# EAGLE board pinconnections (EAGLE 8.2.2)
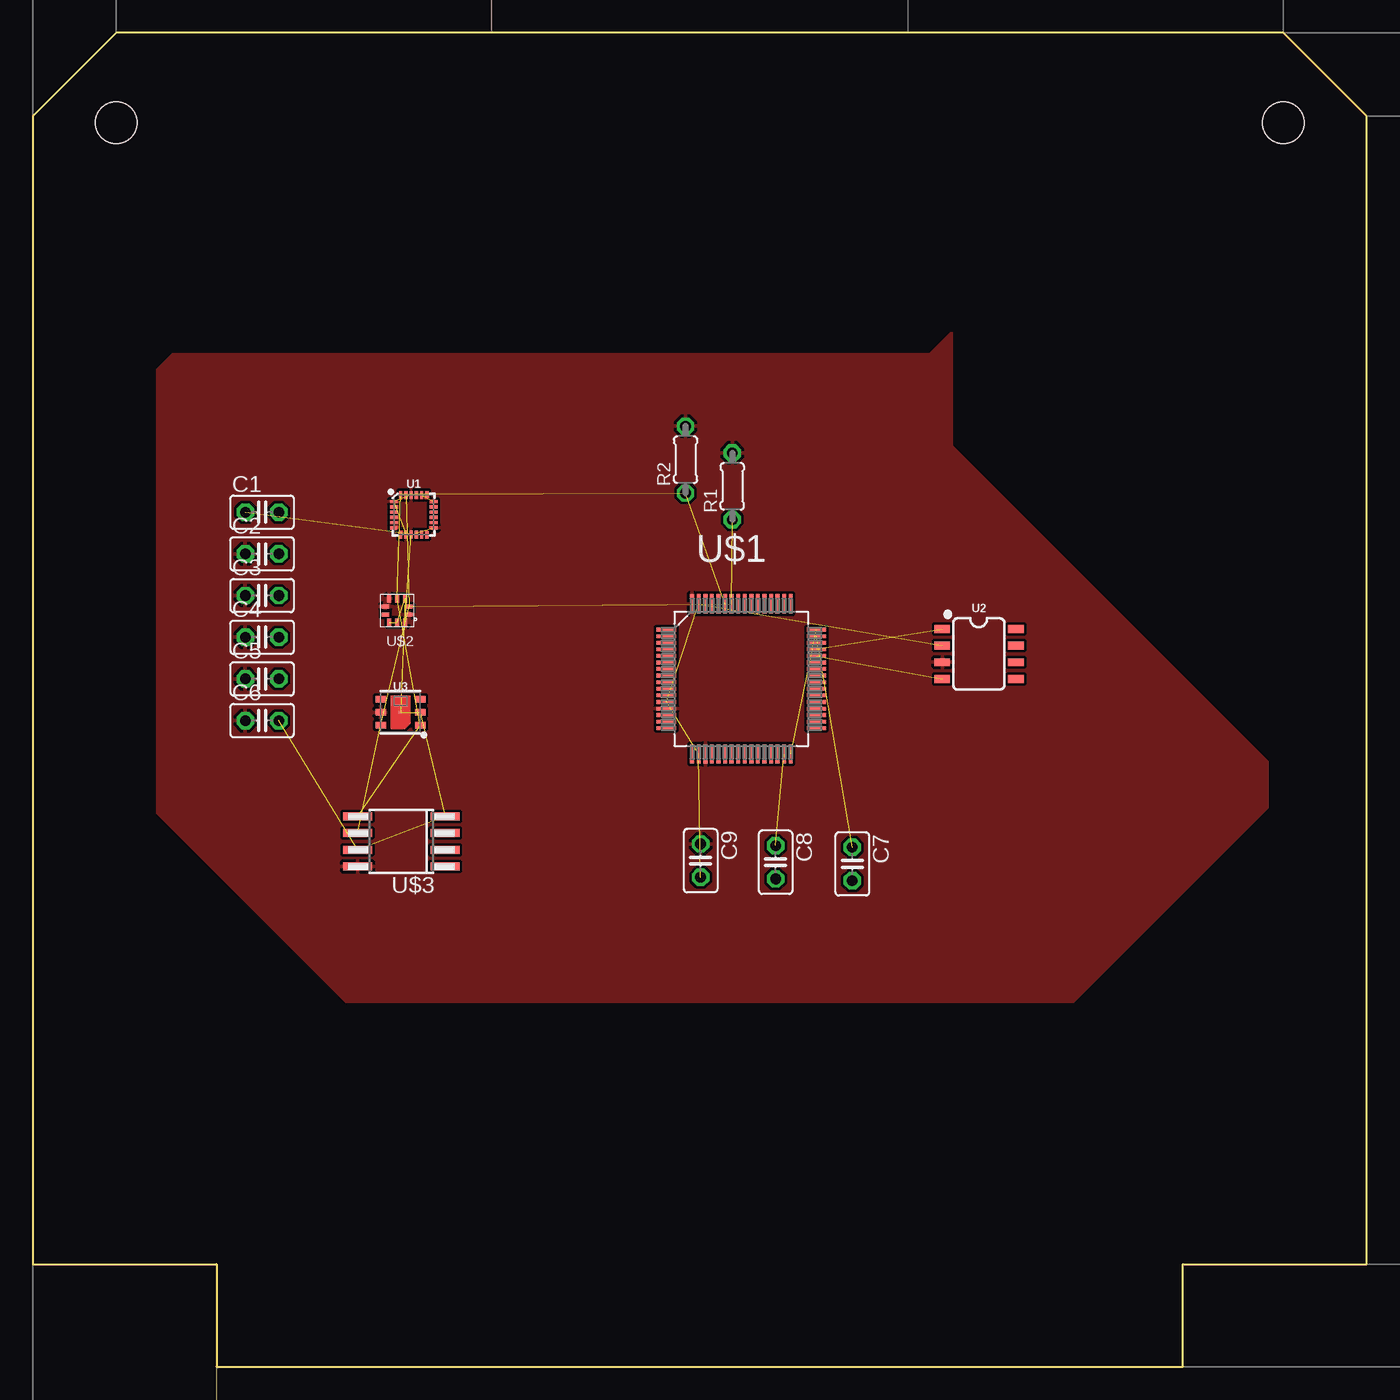
[diagram p0: board, top side]
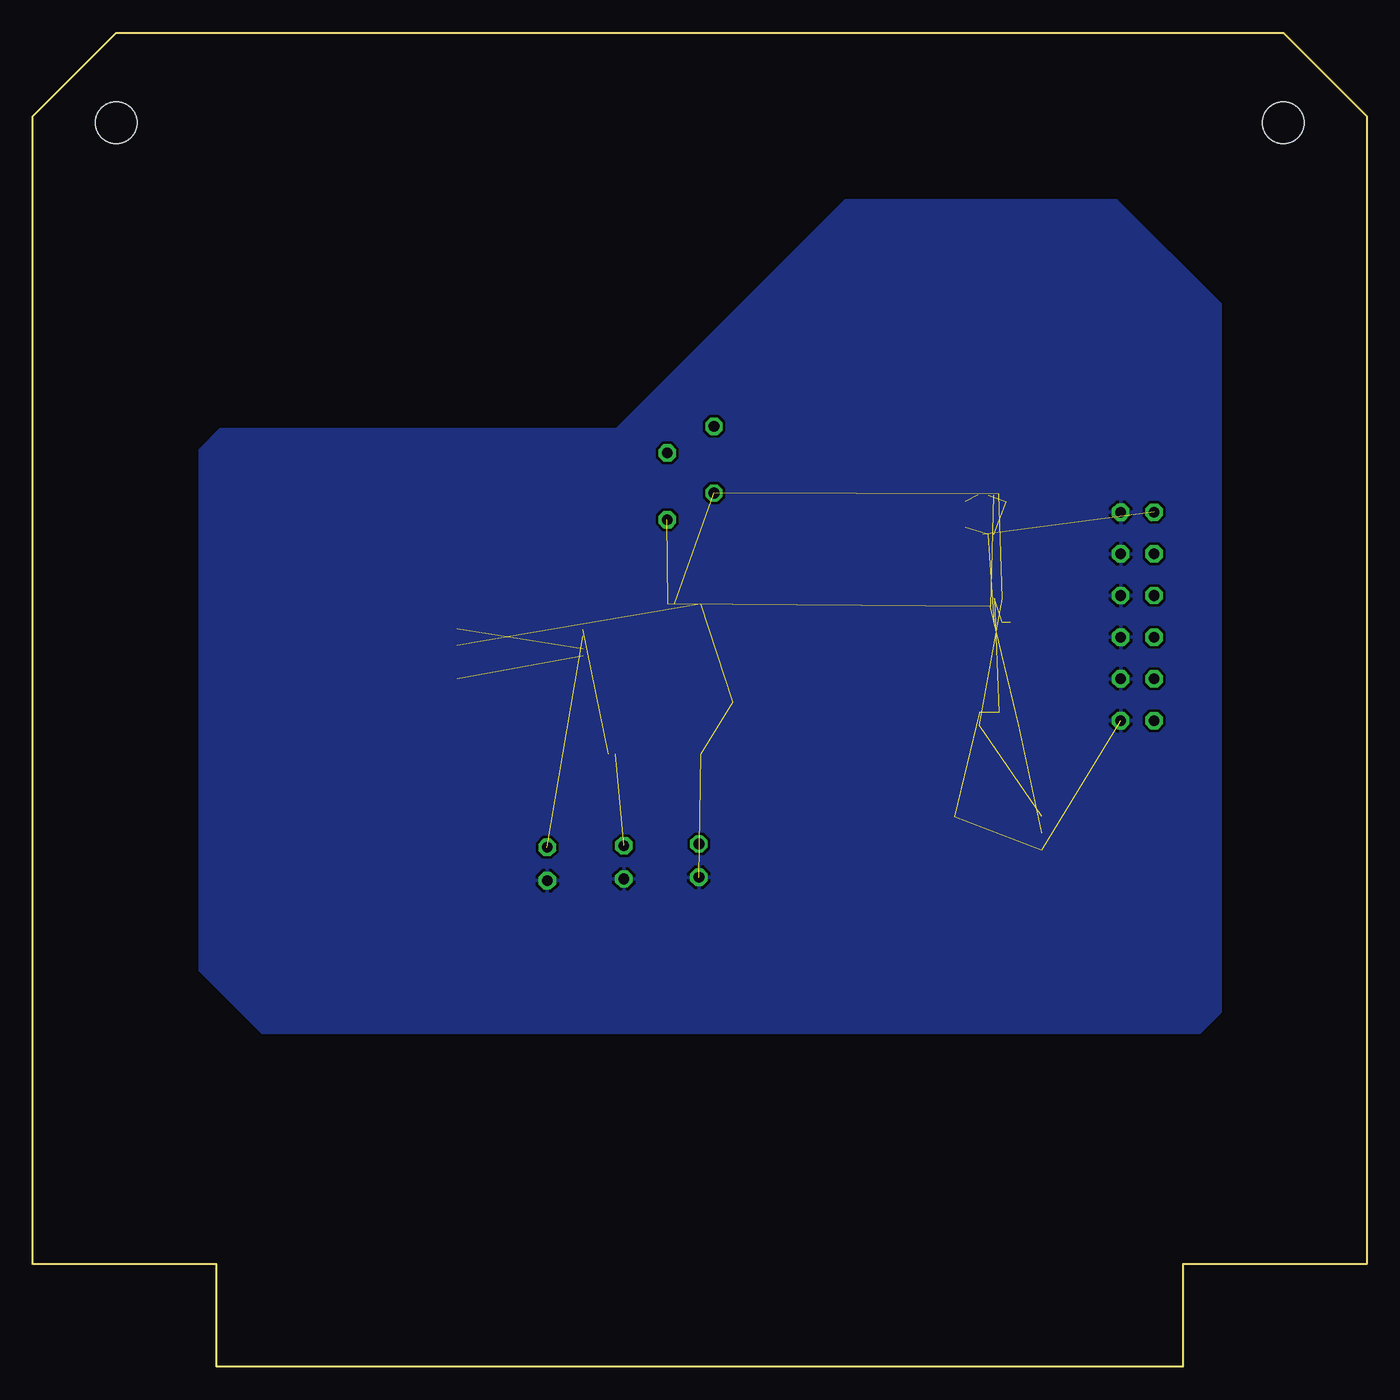
[diagram p1: board, bottom side, seen from below]

Size 101.6 x 101.6 mm. Coordinates in mm from the lower left corner, seen from the top.
Outline: 14,0 87.6,0 87.6,7.8 101.6,7.8 101.6,95.25 95.25,101.6 6.35,101.6 0,95.25 0,7.8 14,7.8 14,0
Copper layers (1*16): Top 0.035mm / dielectric 1.5mm / Bottom 0.035mm
Design rules "battery_balancer": minimum track width 6mil, minimum drill 0.35mm, track to track 0.205mm, track to pad 0.205mm, pad to pad 0.205mm, via to via 0.205mm, smd to smd 6mil, copper to edge 40mil, drill to drill 6mil, minimum pad ring 10mil, minimum via ring 8mil, stop-mask expansion 4mil, vias tented up to drill 0mil, thermal gap 10mil
Holes 3.17 mm at 6.35,94.74 95.25,94.74

## Footprints (pad centres in the part's own frame; a part is rotated, then mirrored left to right if it is on the bottom)
C025-025X050 = drill 0.813 octagon: 1 -1.27,0; 2 1.27,0
0204/5 = drill 0.813 octagon: 1 -2.54,0; 2 2.54,0
QFN24-3X3 = smd 0.495 x 0.25: 1 -1.552,1; 6 -1.552,-1; 13 1.552,-1; 18 1.552,1 | smd 0.6 x 0.25: 2 -1.5,0.6; 3 -1.5,0.2; 4 -1.5,-0.2; 5 -1.5,-0.6; 14 1.5,-0.6; 15 1.5,-0.2; 16 1.5,0.2; 17 1.5,0.6 | smd 0.25 x 0.495: 7 -1,-1.552; 12 1,-1.552; 19 1,1.552; 24 -1,1.552 | smd 0.25 x 0.6: 8 -0.6,-1.5; 9 -0.2,-1.5; 10 0.2,-1.5; 11 0.6,-1.5; 20 0.6,1.5; 21 0.2,1.5; 22 -0.2,1.5; 23 -0.6,1.5
SO08 = smd 0.6 x 1.2: 1 -1.905,-2.8; 2 -0.635,-2.8; 3 0.635,-2.8; 4 1.905,-2.8; 5 1.905,2.8; 6 0.635,2.8; 7 -0.635,2.8; 8 -1.905,2.8
DFN-6-3X3-HTU21D = smd 0.2 x 0.2: 7 0,0 | smd 0.8 x 0.5: DATA 1.5,-1; GND 1.5,0; NC@1 -1.5,1; NC@6 1.5,1; SCK -1.5,-1; VDD -1.5,0
STM32F405RG = smd 1.473 x 0.279: 1 -5.715,3.759; 2 -5.715,3.251; 3 -5.715,2.743; 4 -5.715,2.261; 5 -5.715,1.753; 6 -5.715,1.245; 7 -5.715,0.762; 8 -5.715,0.254; 9 -5.715,-0.254; 10 -5.715,-0.762; 11 -5.715,-1.245; 12 -5.715,-1.753; 13 -5.715,-2.261; 14 -5.715,-2.743; 15 -5.715,-3.251; 16 -5.715,-3.759; 33 5.715,-3.759; 34 5.715,-3.251; 35 5.715,-2.743; 36 5.715,-2.261; 37 5.715,-1.753; 38 5.715,-1.245; 39 5.715,-0.762; 40 5.715,-0.254; 41 5.715,0.254; 42 5.715,0.762; 43 5.715,1.245; 44 5.715,1.753; 45 5.715,2.261; 46 5.715,2.743; 47 5.715,3.251; 48 5.715,3.759 | smd 0.279 x 1.473: 17 -3.759,-5.715; 18 -3.251,-5.715; 19 -2.743,-5.715; 20 -2.261,-5.715; 21 -1.753,-5.715; 22 -1.245,-5.715; 23 -0.762,-5.715; 24 -0.254,-5.715; 25 0.254,-5.715; 26 0.762,-5.715; 27 1.245,-5.715; 28 1.753,-5.715; 29 2.261,-5.715; 30 2.743,-5.715; 31 3.251,-5.715; 32 3.759,-5.715; 49 3.759,5.715; 50 3.251,5.715; 51 2.743,5.715; 52 2.261,5.715; 53 1.753,5.715; 54 1.245,5.715; 55 0.762,5.715; 56 0.254,5.715; 57 -0.254,5.715; 58 -0.762,5.715; 59 -1.245,5.715; 60 -1.753,5.715; 61 -2.261,5.715; 62 -2.743,5.715; 63 -3.251,5.715; 64 -3.759,5.715
LPS25H = smd 0.55 x 0.32: 1 -0.9,0.3; 2 -0.9,-0.3; 6 0.9,-0.3; 7 0.9,0.3 | smd 0.32 x 0.55: 3 -0.6,-0.9; 4 0,-0.9; 5 0.6,-0.9; 8 0.6,0.9; 9 0,0.9; 10 -0.6,0.9
SO-08M = smd 0.6 x 2.2: 1 -1.905,-3.33; 2 -0.635,-3.33; 3 0.635,-3.33; 4 1.905,-3.33; 5 1.905,3.33; 6 0.635,3.33; 7 -0.635,3.33; 8 -1.905,3.33
SOIC8 = smd 0.6 x 1.55: P$1 -3.83,-0.29; P$2 -2.57,-0.28; P$3 -1.29,-0.28; P$4 -0.02,-0.28; P$5 -0.02,5.11; P$6 -1.29,5.11; P$7 -2.57,5.11; P$8 -3.83,5.11

## Placement (x,y rotation side)
C1  0.1uF  [C025-025X050]  17.46,65.09 0 top
C2  0.1uF  [C025-025X050]  17.46,61.91 0 top
C3  10nF  [C025-025X050]  17.46,58.74 0 top
C4  100uF  [C025-025X050]  17.46,55.56 0 top
C5  4.7uF  [C025-025X050]  17.46,52.39 0 top
C6  100nF  [C025-025X050]  17.46,49.21 0 top
C7  2.2uF  [C025-025X050]  62.42,38.29 270 top
C8  2.2uF  [C025-025X050]  56.58,38.42 270 top
C9  4.7uF  [C025-025X050]  50.86,38.54 270 top
R1  2.2k  [0204/5]  53.28,67.06 90 top
R2  2.2k  [0204/5]  49.72,69.09 90 top
U1  MPU-9250  [QFN24-3X3]  29.02,64.9 0 top
U2  MCP2551  [SO08]  72.07,54.29 270 top
U3  HTU21D  [DFN-6-3X3-HTU21D]  28,49.85 0 top
U$1  STM32F405RG  [STM32F405RG]  53.98,52.39 0 top
U$2  LPS25H  [LPS25H]  27.75,57.59 180 top
U$3  24AA02  [SO-08M]  28.07,40.01 90 top
U$4  MCP2561  [SOIC8]  -5.84,-5.46 0 top  (outside the outline)

## Library data of the parts
C1-C9 = rcl
R1 R2 = resistor
U1 = SparkFun-Sensors; PROD_ID: IC-13192
U2 = SparkFun-IC-Comms; PROD_ID: IC-09907
U3 = SparkFun-Sensors; PROD_ID: IC-11793
U$1 U$2 = st-microelectronics
U$3 = microchip
U$4 = MCP2561; AVAILABILITY: Warning; DESCRIPTION: MCP2561 Series 5.5 V 8 Mbps High-Speed CAN Flexible Data Rate Transceiver-SOIC-8; MF: Microchip; MP: MCP2561FD-E/SN; PACKAGE: SOIC-8 Microchip; PRICE: 0.91 USD

## Nets
+3V3: U$1.32 U$1.48
GND: C1.2 C2.2 C3.2 C4.2 C5.2 C6.2 C7.2 C8.2 C9.2 U2.2 U3.7 U3.GND U$1.12 U$1.18 U$1.63 U$2.3 U$2.8 U$2.9 U$3.4 U$3.7
N$1: C8.1 U$1.31
N$2: C1.1 U1.10
N$3: U2.1 U$1.45
N$4: U1.18 U1.20
N$5: U2.4 U$1.44
N$6: U2.6
N$7: U2.7
N$8: C7.1 U$1.47
SCL: R1.1 U1.23 U3.SCK U$1.58 U$2.2 U$3.6
SDA: R2.1 U1.24 U3.DATA U$1.59 U$2.4 U$3.5
VDD: C2.1 C3.1 C4.1 C5.1 C6.1 C9.1 R1.2 R2.2 U1.1 U1.8 U1.9 U1.13 U1.22 U2.3 U3.VDD U$1.13 U$1.19 U$1.64 U$2.1 U$2.5 U$2.6 U$2.10 U$3.8

## Tracks (layer width: path | path; a pad name or v marks a point on that pad's centre or on a via)
+3V3  (1 unrouted)
GND  (11 unrouted)
  pour Bottom: 11.11,80.96 11.11,26.99 12.7,25.4 84.14,25.4 88.9,30.16 88.9,69.85 87.31,71.44 57.15,71.44 39.69,88.9 19.05,88.9
N$1  (1 unrouted)
N$2  (1 unrouted)
N$3  (1 unrouted)
N$4  (1 unrouted)
N$5  (1 unrouted)
N$8  (1 unrouted)
SCL  (5 unrouted)
SDA  (5 unrouted)
VDD  (4 unrouted)
  pour Top: 79.25,27.81 75.69,27.81 23.88,27.81 9.53,42.16 9.53,75.95 10.67,77.09 68.33,77.09 69.98,78.74 69.98,70.1 93.98,46.1 93.98,42.93 93.98,42.67 93.98,42.55